# Altium PCB STM32F101.PcbDoc
Units mm, origin at the board's own origin, x right, y up, seen from the top; angles counter-clockwise.
Board outline 45 x 45 mm, 2 copper layers (Top Layer, Bottom Layer); 38 components, 25 nets, 183 pads, 61 vias.
Unrouted connection lines stored in the file: 3.
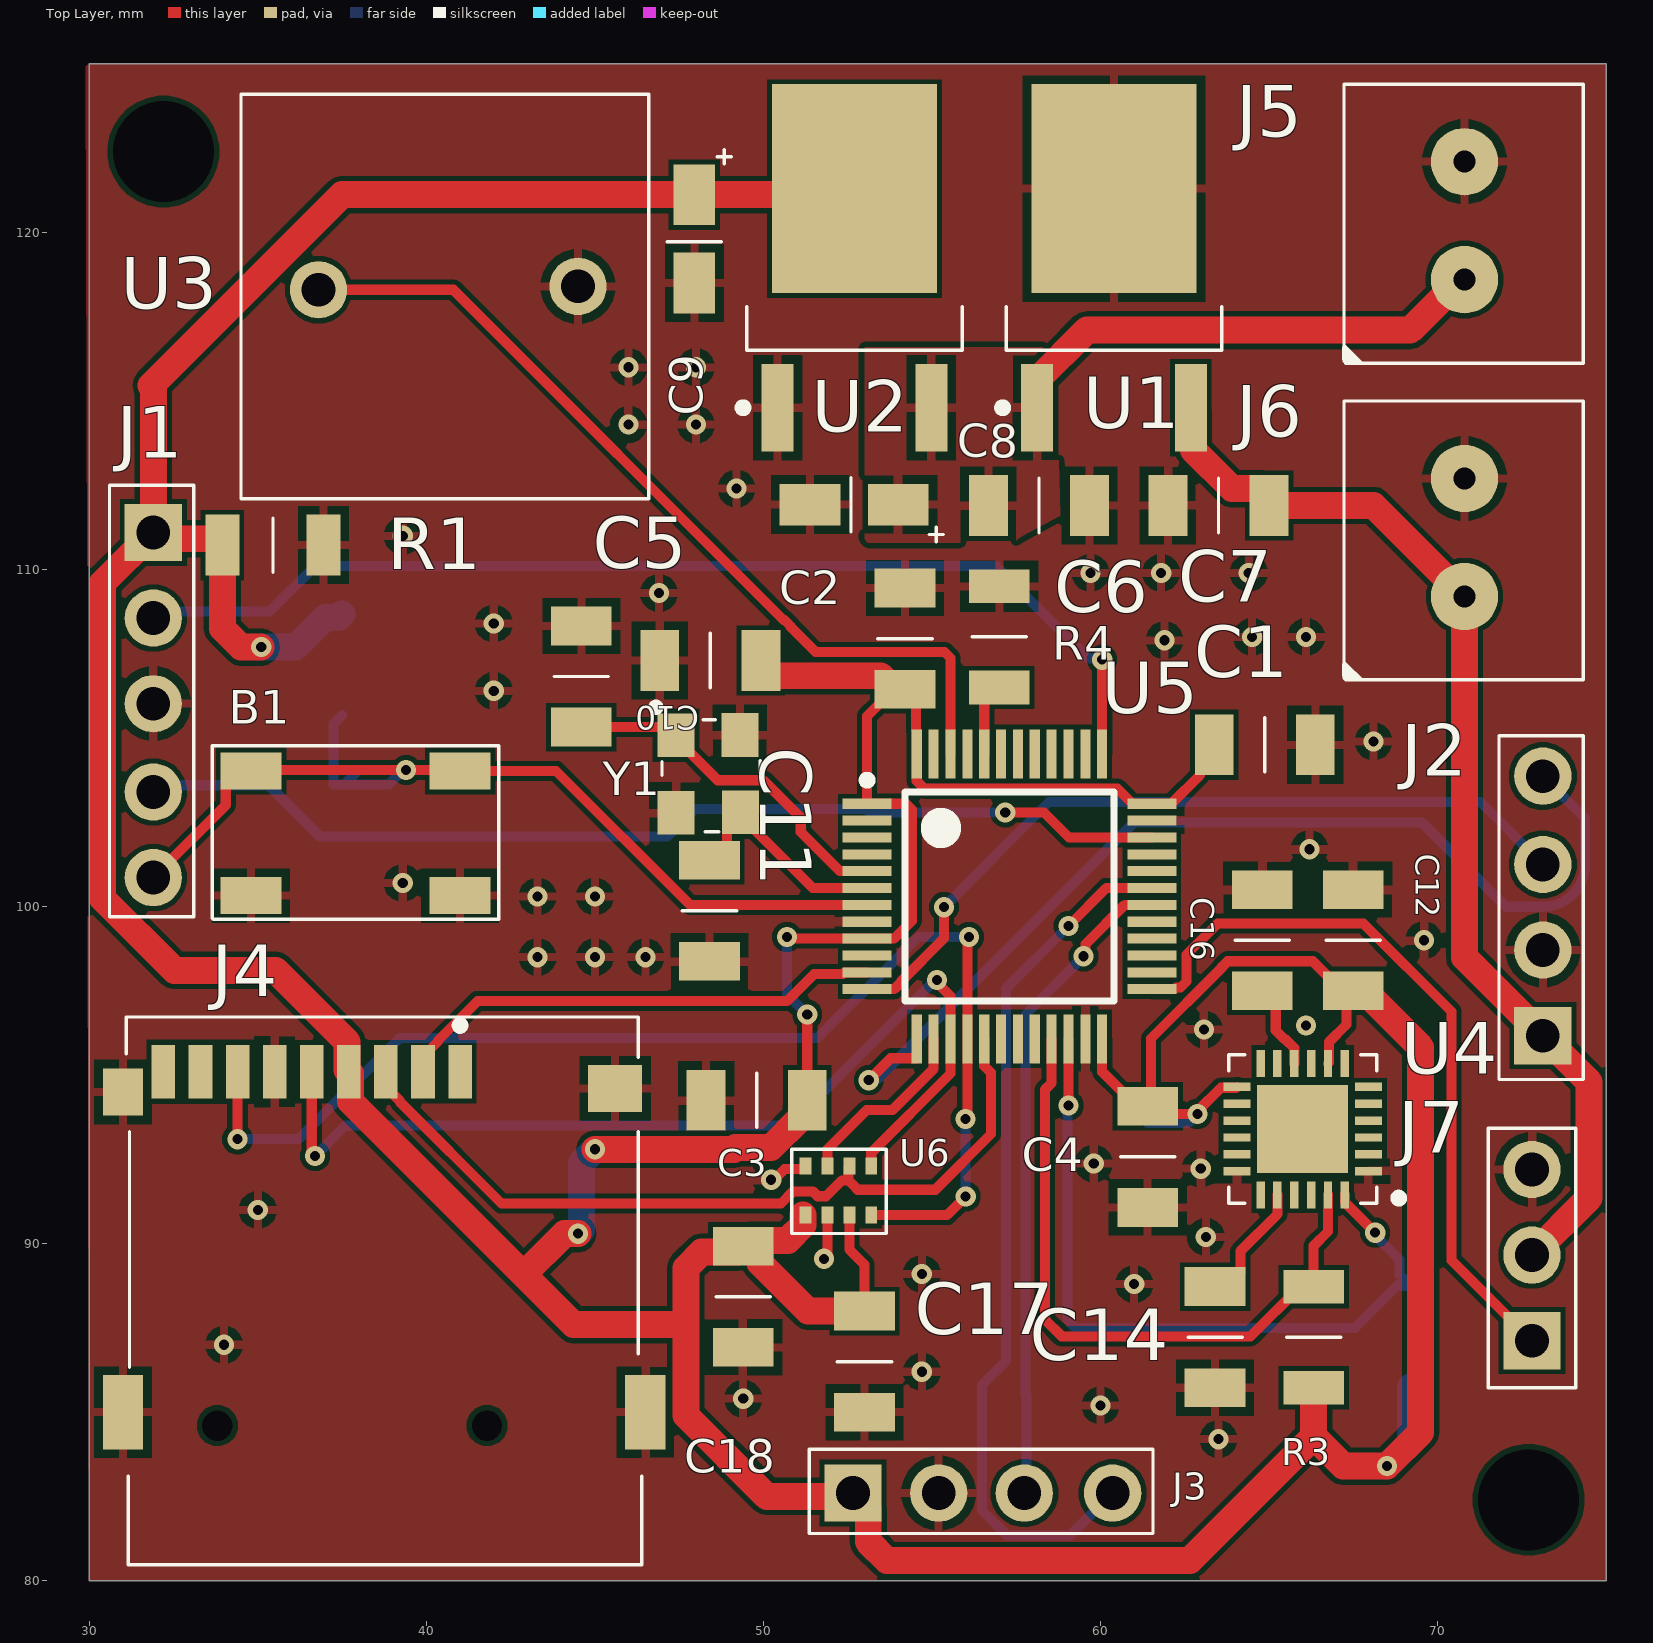
[diagram p0: Top Layer view]
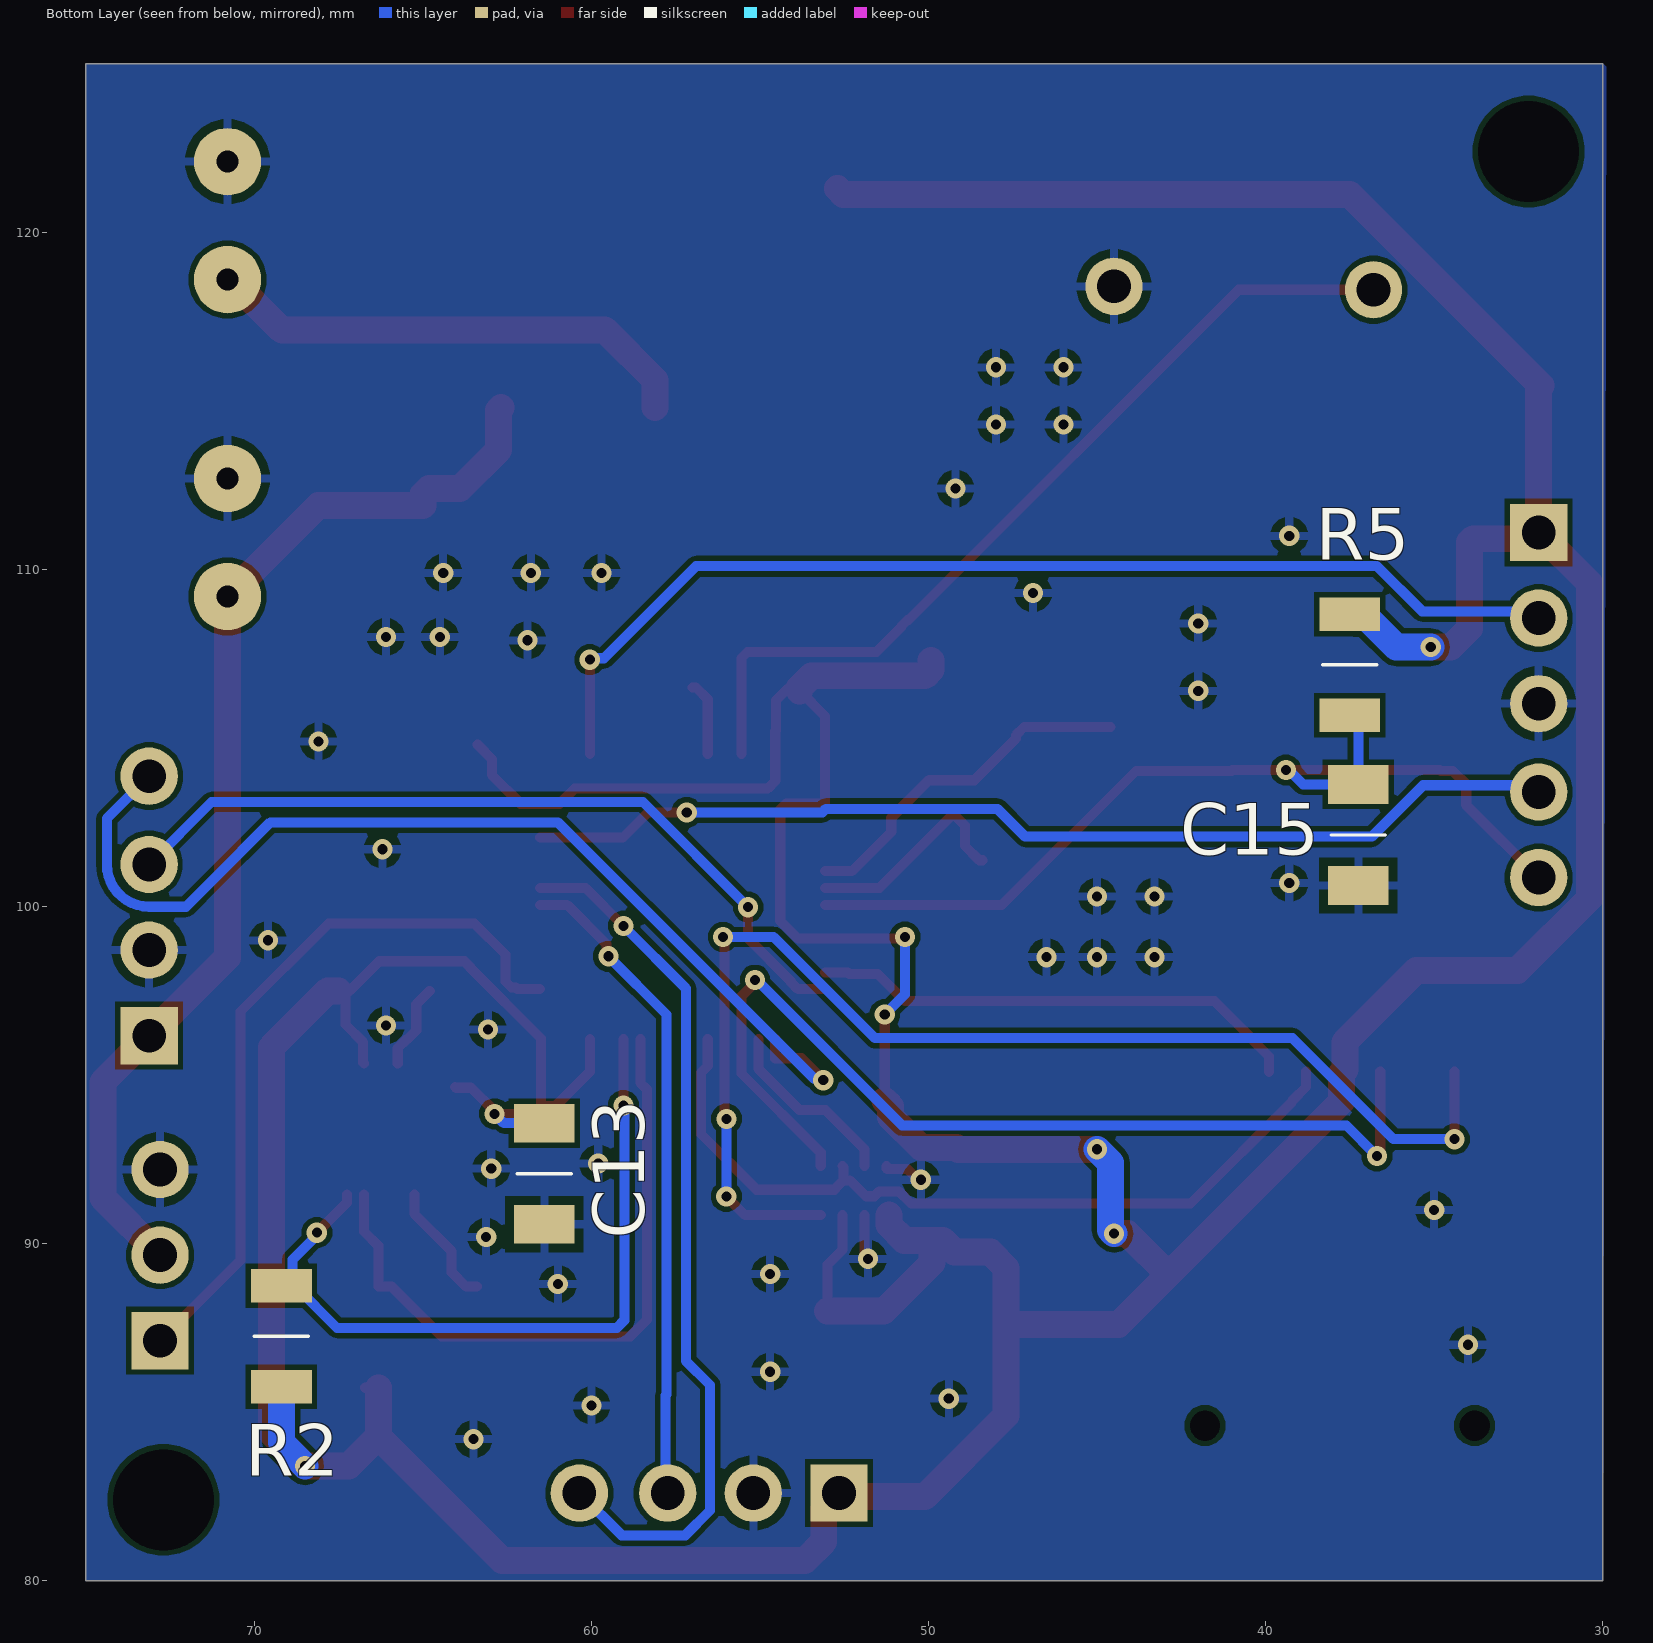
[diagram p1: Bottom Layer view, seen from below]
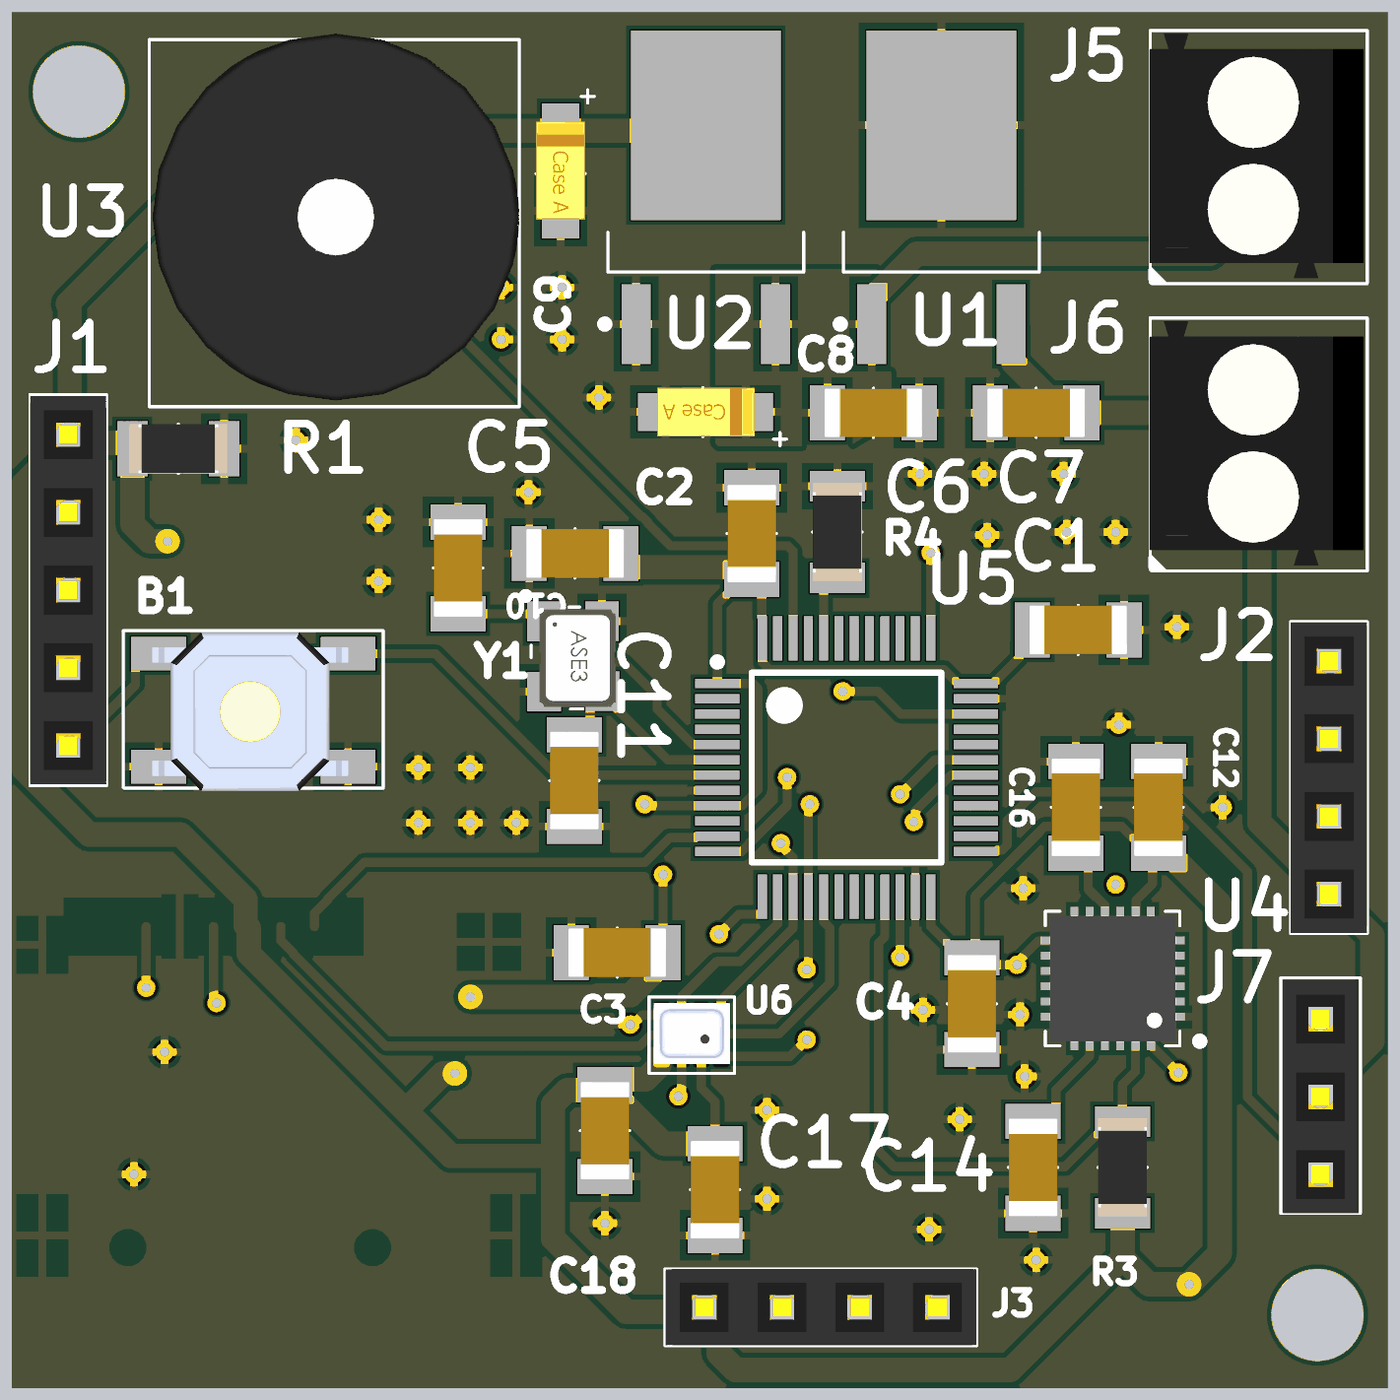
[diagram p2: 3D render of the assembled board from above, using the file's embedded part models]
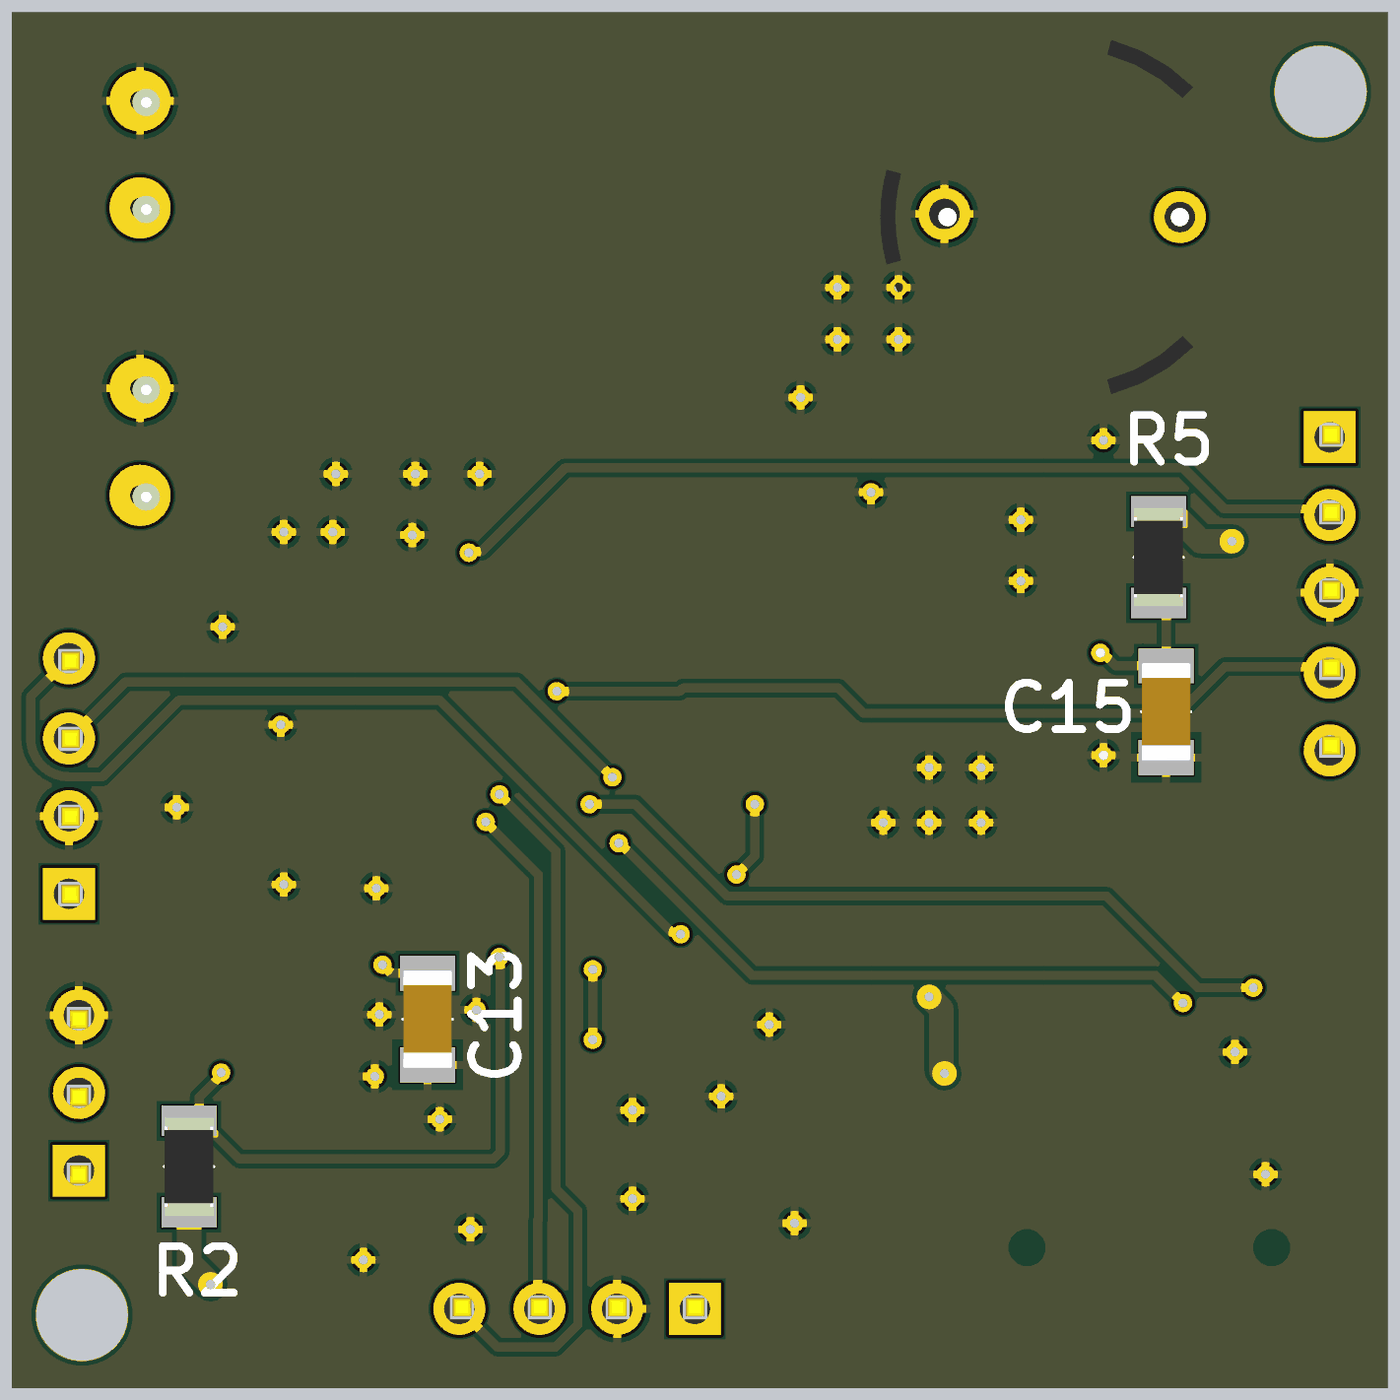
[diagram p3: 3D render of the assembled board from below, using the file's embedded part models]

## Layer stack, top to bottom
Top Solder: solder mask 0.0102, Solder Resist, Dk 3.5
Top Layer: signal copper 0.0356
Dielectric 1: dielectric 0.32, FR-4, Dk 4.8
Bottom Layer: signal copper 0.0356
Bottom Solder: solder mask 0.0102, Solder Resist, Dk 3.5

## Board outline
30,80 30,125 75,125 75,80

## Design rules (kind name [scope] priority, off if disabled: settings)
Clearance [All] p1: gap=0.254 ignorepadtopadclearanceinfootprint=FALSE except(0: Arc-Hole Track-Hole SMDPad-Hole THPad-Hole Via-Hole Fill-Hole Poly-Hole Region-Hole Text-Hole; 0.152: Arc-Track Arc-SMDPad Arc-Poly Track-Track Track-SMDPad Track-Poly SMDPad-SMDPad SMDPad-THPad SMDPad-Poly THPad-Poly Via-Poly Fill-Poly Poly-Poly)
PolygonConnect [All] p1: connectstyle=Relief reliefconductorwidth=0.254 reliefentries=4 polygonreliefangle="90 Angle" airgapwidth=0.254
RoutingVias [All] p1: holewidth=0.3 width=0.6 viastyle="Through Hole" minholewidth=0.2 minwidth=0.2 maxholewidth=0.9 maxwidth=1.27
SolderMaskExpansion [All] p1: expansion=0.102 istentingtop=FALSE
Width [All] p1: maxlimit=1 minlimit=0.254 preferedwidth=0.3 minimp=50.000000 maximp=50.000000 favimp=50.000000
30 further rules are at their usual default settings.

## Components (designator, comment, footprint, x,y, rotation, side; value= is the part's Value field where it differs from the comment)
B1 "PUSH BUTTON" "PUSH BUTTON" 37.7,102.025 r0 top
C1 "0.1 uF C1206" C1206 64.8,104.8 r0 top
C2 "0.1 uF C1206" C1206 54.2,107.875 r90 top
C3 "0.1 uF C1206" C1206 49.875,94.25 r180 top
C4 "0.1 uF C1206" C1206 61.4,92.65 r270 top
C5 "0.1 uF C1206" C1206 48.5,107.3 r180 top
C6 "330nf C1206" C1206 58.1,111.9 r0 top
C7 "0.1 uF C1206" C1206 63.575,111.9 r180 top
C8 "10uF TANTAL" "C1206 TANTAL" 52.8,111.925 r180 top
C9 "10uF TANTAL" "C1206 TANTAL" 47.95,119.92 r270 top
C10 "16 pF" C1206 44.6,106.9 r270 top
C11 "16 pF" C1206 48.4,99.8 r90 top
C12 "0.1 uF C1206" C1206 67.5,98.925 r90 top
C13 "0.1 uF C1206" C1206 61.4,92.15 r270 bottom
C14 "2.2 nF" C1206 63.4,87.3 r270 top
C15 "0.1 uF C1206" C1206 37.25,102.2 r270 bottom
C16 "0.1 uF C1206" C1206 64.8,98.925 r90 top
C17 "0.1 uF C1206" C1206 53,86.575 r270 top
C18 "0.1 uF C1206" C1206 49.4,88.5 r270 top
J1 "HEADER 2.54 1x5" "HEADER 2.54 1x5" 31.9,111.1 r270 top
J2 "HEADER 2.54 1x4" "HEADER 2.54 1x4" 73.125,96.17 r90 top
J3 "HEADER 2.54 1x4" "HEADER 2.54 1x4" 52.66,82.6 r0 top
J4 "MICRO SD CARD HOLDER" "MICRO SD CARD HOLDER" -5.984,75.025 r0 top
J5 "KLEMENS 3.5mm" "KLEMENS 3.5mm" 78.55,98.5 r90 top
J6 "KLEMENS 3.5mm" "KLEMENS 3.5mm" 78.55,89.1 r90 top
J7 "HEADER 2.54 1x3" "HEADER 2.54 1x3" 72.8,87.12 r90 top
R1 "10K R1206" "1206 RESISTOR" 35.375,110.825 r0 top
R2 "4.7K R1206" "1206 RESISTOR" 69.3,87.175 r90 bottom
R3 "4.7K R1206" "1206 RESISTOR" 66.225,87.15 r90 top
R4 "10K R1206" "1206 RESISTOR" 56.9,107.925 r90 top
R5 "10K R1206" "1206 RESISTOR" 37.4,107.25 r270 bottom
U1 "L7805-DPAK" DPAK228P972X230-3N 60.4,118.95 r90 top
U2 "LD108633 DPAK" DPAK228P972X230-3N 52.7,118.95 r90 top
U3 "BUZZER 5V" "BUZZER 5V" 37,118.2 r90 top
U4 "MPU6050" QFN50P400X400X90_HS-25N 66,93.4 r180 top
U5 "STM32F101" LFQP48-STM32 57.3,100.3 r0 top
U6 "BMP280" BMP280 51.24,92.299 r90 top
Y1 "8Mhz 12.5 pF Osc" "8 Mhz Osc" 48.5,104 r270 top

## Footprints (in the part's own frame and the unit in brackets; to place one, negate y for a bottom-side part, rotate by r counter-clockwise, add the part's x,y. Pads: shape width x height; smd on the part's side, far side on the other; paste and mask are expansions set on the pad)
"8 Mhz Osc" [mm]
  rect 1.3x1.1 smd mask+0.05: 1(-1.081,-1.09) 2(1.219,-1.09) 3(1.203,0.817) 4(-1.086,0.801)
  silkscreen extent -2.01,-1.79 1.78,1.41, body extent -1.48,-1.24 1.72,1.26, height 1.22
"1206 RESISTOR" [mm]
  rect 1x1.8 smd mask+0.05: 1(-1.425,-0.1) 2(1.575,-0.1)
  silkscreen extent 0.08,-0.9 0.08,0.71, body extent -1.52,-0.9 1.68,0.71, height 0.55
BMP280 [mm]
  rect 0.5x0.35 smd: 1(0.001,-0.01) 2(0.001,-0.66) 3(0.001,-1.31) 4(0.001,-1.96) 5(-1.449,-1.96) 6(-1.449,-1.31) 7(-1.449,-0.66) 8(-1.449,-0.01)
  silkscreen extent -2,-2.4 0.5,0.4, body extent -1.7,-2.25 0.3,0.25, height 0.95
"BUZZER 5V" [mm]
  round 1.7 hole 1: 1(0.1,0.2) 2(0.2,-7.5)
  silkscreen extent -6.1,-9.6 5.9,2.5, body extent -5.9,-9.6 6.1,2.4, height 9
C1206 [mm]
  rect 1.15x1.8 smd mask+0.05: 1(-1.425,0) 2(1.575,0)
  silkscreen extent 0.08,-0.8 0.08,0.81, body extent -1.52,-0.8 1.68,0.8, height 1
"C1206 TANTAL" [mm]
  rect 1.8x1.23 smd mask+0.05: 1(-1.2,0) 1(-1.2,0) 2(1.42,0)
  silkscreen extent -2.54,-0.8 0.2,1.1, body extent -1.5,-0.8 1.7,0.8, height 1.62
DPAK228P972X230-3N [mm] "D-PAK, 3-Pads, Body 6,40x6,56mm (max), IPC Medium Density"
  rect 2.6x0.95 smd mask+0.05: 1(-4.15,2.28) 2(-4.15,-2.28)
  rect 6.2x4.9 smd mask+0.05: 3(2.35,0)
  silkscreen extent -4.27,-3.2 -1.15,3.43, body extent -2.5,-3.2 4.1,3.2, height 2.3
"HEADER 2.54 1x3" [mm]
  rect 1.7x1.7 hole 1: 1(0,0)
  round 1.7 hole 1: 2(2.54,0) 3(5.08,0)
  silkscreen extent -1.4,-1.3 6.3,1.3, body extent -1.4,-1.25 6.22,1.25, height 9.1
"HEADER 2.54 1x4" [mm]
  rect 1.7x1.7 hole 1: 1(0,0)
  round 1.7 hole 1: 2(2.54,0) 3(5.08,0) 4(7.7,0)
  silkscreen extent -1.3,-1.2 8.9,1.3, body extent -1.28,-1.2 8.88,1.3, height 9.1
"HEADER 2.54 1x5" [mm]
  rect 1.7x1.7 hole 1: 1(0,0)
  round 1.7 hole 1: 2(2.54,0) 3(5.08,0) 4(7.7,0) 5(10.24,0)
  silkscreen extent -1.4,-1.3 11.4,1.2, body extent -1.35,-1.3 11.35,1.2, height 9.1
"KLEMENS 3.5mm" [mm]
  round 2 hole 0.65: 1(20.1,7.75) 2(23.6,7.75)
  silkscreen extent 17.59,4.22 25.9,11.38, body extent 17.8,4.35 25.79,11.35, height 8.9
LFQP48-STM32 [mm]
  rect 1.45x0.3 smd mask+0.05: 1(-4.225,2.75) 2(-4.225,2.25) 3(-4.225,1.75) 4(-4.225,1.25) 5(-4.225,0.75) 6(-4.225,0.25) 7(-4.225,-0.25) 8(-4.225,-0.75) 9(-4.225,-1.25) 10(-4.225,-1.75) 11(-4.225,-2.25) 12(-4.225,-2.75) 25(4.225,-2.75) 26(4.225,-2.25) 27(4.225,-1.75) 28(4.225,-1.25) 29(4.225,-0.75) 30(4.225,-0.25) 31(4.225,0.25) 32(4.225,0.75) 33(4.225,1.25) 34(4.225,1.75) 35(4.225,2.25) 36(4.225,2.75)
  rect 0.3x1.45 smd mask+0.05: 13(-2.75,-4.225) 14(-2.25,-4.225) 15(-1.75,-4.225) 16(-1.25,-4.225) 17(-0.75,-4.225) 18(-0.25,-4.225) 19(0.25,-4.225) 20(0.75,-4.225) 21(1.25,-4.225) 22(1.75,-4.225) 23(2.25,-4.225) 24(2.75,-4.225) 37(2.75,4.225) 38(2.25,4.225) 39(1.75,4.225) 40(1.25,4.225) 41(0.75,4.225) 42(0.25,4.225) 43(-0.25,4.225) 44(-0.75,4.225) 45(-1.25,4.225) 46(-1.75,4.225) 47(-2.25,4.225) 48(-2.75,4.225)
  silkscreen extent -4.35,-3.1 3.1,3.57, body extent -3.5,-3.5 3.5,3.5, height 1.6
"MICRO SD CARD HOLDER" [mm]
  rect 0.7x1.6 smd paste+0 mask+0: 1(46.984,20.075) 2(45.884,20.075) 3(44.784,20.075) 4(43.684,20.075) 5(42.584,20.075) 6(41.484,20.075) 7(40.384,20.075) 8(39.284,20.075) Cd(38.184,20.075)
  rect 1.2x1.4 smd paste+0 mask+0: 10(36.984,19.475)
  rect 1.6x1.4 smd paste+0 mask+0: 11(51.584,19.575)
  rect 1.2x2.2 smd paste+0 mask+0: 12(36.984,9.975) 13(52.484,9.975)
  round 0 hole 0.9 unplated paste-1000 mask+0: ""(39.784,9.575) ""(47.784,9.575)
  silkscreen extent 37.08,5.45 52.38,21.7, body extent 36.73,5.58 52.73,20.83, height 1.85
"PUSH BUTTON" [mm]
  rect 1.8x1.1 smd mask+0.05: 1(-2.9,2) 2(3.3,2) 3(-2.9,-1.7) 4(3.3,-1.7)
  silkscreen extent -4.05,-2.4 4.45,2.75, body extent -3.1,-2.5 3.3,2.7, height 1.5
QFN50P400X400X90_HS-25N [mm] "QFN, 24-Leads, Body 4,00x4,00mm, Pitch 0,50mm, Thermal Pad 2,70x2,60mm, IPC Medium Density"
  rect 0.8x0.25 smd mask+0.01: 1(-1.95,1.25) 2(-1.95,0.75) 3(-1.95,0.25) 4(-1.95,-0.25) 5(-1.95,-0.75) 6(-1.95,-1.25) 13(1.95,-1.25) 14(1.95,-0.75) 15(1.95,-0.25) 16(1.95,0.25) 17(1.95,0.75) 18(1.95,1.25)
  rect 0.25x0.8 smd mask+0.01: 7(-1.25,-1.95) 8(-0.75,-1.95) 9(-0.25,-1.95) 10(0.25,-1.95) 11(0.75,-1.95) 12(1.25,-1.95) 19(1.25,1.95) 20(0.75,1.95) 21(0.25,1.95) 22(-0.25,1.95) 23(-0.75,1.95) 24(-1.25,1.95)
  rect 2.7x2.6 smd mask+0.05: 25(0,0)
  silkscreen extent -2.98,-2.2 2.2,2.2, body extent -2.07,-2.07 2.07,2.07, height 0.9

## Part data
C1 C2 C3 C4 C5 C7 C12 C13 C15 C16 C17 C18: "0.1 uF"
C6: "330 nF"
U1: "L7805 5V REGULATOR"
U2: "LD108633 3.3V REGULATOR"
U4: "MPU6050 GYRO"
U5: "STM32F101 48 pinli Mikroişlemci"
U6: "Pressure Sensor"

## Free pads (board coordinates)
  round 0 hole 3: 14(32.2,122.4) 14(32.2,122.4) 14(72.7,82.4)

## Via types
v1: diameter 0.6, hole 0.3, Top Layer to Bottom Layer, 61 vias

## Nets (pads, with @x,y where several pads share a name; then routed paths per layer and width w, separated by ;. In a path a pad name is that pad's centre, name@x,y a point inside that pad or via, vN(x,y) a via of type N, cw(c..) or ccw(c..) an arc to the next point about the centre after c; other vN are vias at no path point)
3.3V: C1.1 C2.1 C3.1 C4.1 C5.1 C9.1 C12.1 C13.1 C17.1 C18.1 J1.1 J3.1 J4.4 R1.1 R2.1 R3.1 R5.1 U2.3 U4.8 U4.13 U5.1 U5.9 U5.24 U5.36 U5.48 U6.6 U6.8 | length 198.9
  Top Layer w0.3: v1(50.7,99.1) 50.75,99.05 U5.9 53.877,99.05 54.4,99.573 54.4,102.874 54.224,103.05 U5.1 53.075,105.65 53.825,106.4 53.875,106.45 C2.1 54.525,106.125 54.525,105.213 54.55,105.188 U5.48 54.55,103.723 54.775,103.498 60.502,103.498 60.95,103.05 U5.36 62.1,103.05 62.95,103.9 62.95,104.375 C1.1 ; C3.1 v1(51.3,96.8) ; U6.6 52.55,89.825 53,89.375 C17.1 ; U5.24 60.05,95.1 61.075,94.075 C4.1 ; U4.13 64.025,94.625 63.573,94.625 62.875,93.927 v1(62.875,93.85) 61.625,93.85 C4.1 ; R3.1 R3.1@66.725,85.725 ; U4.8 66.775,95.375 66.775,95.975 67.3,96.5 67.3,97.3 C12.1 67.175,97.5 66.298,98.377 63.775,98.377 63.598,98.2 63.598,98.182 61.5,96.084 61.5,94.175 C4.1
  Top Layer w0.8: v1(35.1,107.7) 34.5,107.7 33.95,108.25 33.95,110.812 33.85,110.912 32.087,110.912 J1.1 ; v1(44.496,90.296) 44.096,90.296 42.885,89.085 ; v1(45,92.8) v1(45,92.8) 49.125,92.798 49.176,92.849 50.224,92.849 51.125,93.75 51.125,94.075 C3.1 ; C18.1@49.9,89.75 49.9,89.425 51.325,88 C17.1 ; C5.1 49.925,107.023 50.1,106.848 53.477,106.848 53.825,106.5 C2.1@53.825,106.4 ; U6.8@51.173,90.85 51.173,90.55 50.723,90.1 49.575,90.1 C18.1 49.225,89.75 48.169,89.75 47.7,89.281 47.7,87.6 ; U2.3 52.52,121.12 47.95,121.12 37.493,121.12 31.837,115.463 31.9,115.4 J1.1 ; R3.1 66.325,84.275 ; C12.1 67.825,97.5 69.5,95.825 69.5,84.4 v1(68.5,83.4) 67.2,83.4 66.325,84.275 ; J1.1 30.396,109.596 30.396,100.237 32.524,98.109 35.522,98.109 37.65,95.981 37.65,95.15 J4.4 37.75,95.05 37.75,94.219 42.885,89.085 ; 42.885,89.085 44.369,87.6 47.7,87.6 ; 47.7,87.6 47.7,84.9 50.1,82.5 52.56,82.5 J3.1 53.11,82.15 53.11,81.159 53.669,80.6 62.65,80.6 66.325,84.275
  Bottom Layer w0.3: v1(50.7,99.1) 50.7,97.4 v1(51.3,96.8) ; C13.1 62.6,93.575 v1(62.875,93.85)
  Bottom Layer w0.8: v1(35.1,107.7) 36.125,107.7 37,108.575 37.4,108.575 R5.1 ; v1(44.496,90.296) 44.6,90.4 44.6,92.4 v1(45,92.8) ; v1(68.5,83.4) 69.2,84.1 R2.1
5V: C7.1 J2.1 J6.1 J7.2 U1.2 | length 33.1
  Top Layer w0.8: U1.2 62.755,114.725 62.755,113.545 63.9,112.4 64.825,112.4 65,112.225 C7.1 68.1,111.9 J6.1 70.8,98.495 J2.1 74.5,94.795 74.5,91.36 J7.2
7.4V: C6.1 C8.1 J5.1 U1.1 U2.2 | length 14.7
  Top Layer w0.8: U1.1 58.12,115.625 59.595,117.1 69.189,117.1 70.689,118.6 J5.1
GND: B1.3 B1.4 C1.2 C2.2 C3.2 C4.2 C5.2 C6.2 C7.2 C8.2 C9.2 C10.1 C11.1 C12.2 C13.2 C14.2 C15.2 C16.2 C17.2 C18.2 J1.3 J2.2 J3.2 J4.6 J4.10 J4.11 J4.12 J4.13 J5.2 J6.2 J7.3 R1.2 R4.2 U1.3 U2.1 U3.2 U4.1 U4.9 U4.11 U4.18 U5.8 U5.23 U5.35 U5.47 U6.1 U6.7 Y1.2 Y1.4 | length 2.6
  Top Layer w0.3: v1(50.23,91.895) 50.311,91.895 50.625,92.209 51.225,92.209 51.25,92.234 U6.1 ; v1(51.8,89.55) 51.8,89.631 51.9,89.731 U6.7
  other v1: 63.5,84.2 60,85.2 49.4,85.4 54.7,86.2 34,87 61,88.8 54.7,89.1 63.125,90.2 35,91 62.975,92.225 59.8,92.375 63.075,96.35 66.1,96.475 43.3,98.5 45,98.5 46.5,98.5 69.6,99 43.3,100.3 45,100.3 39.3,100.7 66.2,101.7 68.1,104.9 42,106.4 61.9,107.9 64.5,108 66.1,108 42,108.4 46.9,109.3 59.7,109.9 61.8,109.9 64.4,109.9 39.3,111 49.2,112.4 46,114.3 48,114.3 46,116 48,116
NetC10_2: C10.2 U5.5 Y1.1 | length 10.5
  Top Layer w0.3: C10.2 47.167,105.325 Y1.1 47.41,104.981 48.643,103.749 49.992,103.749 51.109,102.633 51.109,102.214 52.273,101.05 U5.5
NetC11_2: C11.2 U5.6 Y1.3 | length 6.6
  Top Layer w0.3: C11.2 48.492,101.375 48.917,101.8 48.917,102.397 Y1.3 49.317,102.697 51.464,100.55 U5.6
NetC14_1: C14.1 U4.20 | length 3.7
  Top Layer w0.3: C14.1 63.725,88.725 64.15,89.15 64.15,89.775 65.25,90.875 U4.20
NetC16_1: C16.1 U4.10 | length 2.6
  Top Layer w0.3: C16.1 65.2,97.1 65.2,96.325 65.473,96.052 65.5,96.052 65.75,95.802 U4.10
NetJ1_2: J1.2 U5.37 | length 32.7
  Top Layer w0.3: U5.37 v1(60.05,107.325)
  Bottom Layer w0.3: J1.2 32.1,108.76 35.357,108.76 36.697,110.1 56.9,110.1 59.632,107.368 60.007,107.368 v1(60.05,107.325)
NetJ1_4: J1.4 U5.34 | length 31
  Top Layer w0.3: v1(57.173,102.794) 58.325,102.794 59.069,102.05 U5.34
  Bottom Layer w0.3: J1.4 32.1,103.6 35.325,103.6 36.85,102.075 47.134,102.075 47.959,102.9 53.049,102.9 53.155,102.794 v1(57.173,102.794)
NetJ2_3: J2.3 U5.12 | length 23.7
  Top Layer w0.3: U5.12 53.877,97.55 54.102,97.775 54.102,97.802 55.357,99.057 v1(55.357,99.982)
  Bottom Layer w0.3: v1(55.357,99.982) 58.475,103.1 71.275,103.1 J2.3
NetJ2_4: J2.4 U5.13 | length 31.6
  Top Layer w0.3: v1(53.125,94.85) 53.775,95.5 54.55,95.5 U5.13
  Bottom Layer w0.3: v1(53.125,94.85) 53.182,94.907 53.407,94.907 61,102.5 69.528,102.5 71.258,100.769 72.032,99.996 73.125,99.996 ccw(c73.125,101.25) 74.379,101.25 74.379,102.616 J2.4
NetJ3_3: J3.3 U5.30 | length 19.5
  Top Layer w0.3: v1(59.5,98.525) 59.557,98.582 59.557,98.884 60.723,100.05 U5.30
  Bottom Layer w0.3: J3.3 57.8,82.66 57.8,85.5 57.775,85.525 57.775,96.8 v1(59.5,98.525)
NetJ3_4: J3.4 U5.31 | length 26
  Top Layer w0.3: v1(59.05,99.425) 60.175,100.55 U5.31
  Bottom Layer w0.3: v1(59.05,99.425) 57.2,97.575 57.2,86.52 56.486,85.806 56.486,82.081 57.221,81.346 59.106,81.346 J3.4
NetJ4_2: J4.2 U5.11 | length 14.7
  Top Layer w0.3: J4.2 39.9,95.55 40.348,95.998 40.348,96.025 41.523,97.2 50.704,97.2 51.506,98.002 52.364,98.002 52.412,98.05 U5.11
NetJ4_3: J4.3 U5.17 U6.3 | length 24.4
  Top Layer w0.3: J4.3 38.8,94.65 39.213,94.237 39.213,94.21 42.232,91.191 50.521,91.191 50.882,91.552 51.464,91.552 51.61,91.406 51.858,91.406 52.327,91.875 52.525,91.875 ; U6.3 52.525,92.275 52.525,91.875 ; U5.17 56.55,95.273 56.75,95.073 56.75,93.25 55.1,91.6 52.8,91.6 52.663,91.738 52.525,91.875
NetJ4_5: J4.5 U5.15 U6.4 | length 29.8
  Top Layer w0.3: J4.5 36.6,92.781 36.7,92.681 v1(36.7,92.6) ; U6.4 53.2,92.7 55.55,95.05 55.55,97.344 55.15,97.744 v1(55.15,97.825)
  Bottom Layer w0.3: v1(36.7,92.6) 37.604,93.504 50.783,93.504 55.104,97.825 v1(55.15,97.825)
NetJ4_7: J4.7 U5.16 U6.5 | length 37
  Top Layer w0.3: v1(34.4,93.1) J4.7 ; U6.5 55.45,90.85 v1(56,91.4) ; v1(55.996,93.7) 56.05,93.754 U5.16 56.05,99.05 v1(56.1,99.1)
  Bottom Layer w0.3: v1(34.4,93.1) 36.204,93.1 39.2,96.096 51.592,96.096 54.596,99.1 v1(56.1,99.1) ; v1(55.996,93.7) 55.998,93.698 55.998,91.402 v1(56,91.4)
NetJ7_1: J7.1 U5.25 | length 22
  Top Layer w0.3: U5.25 62.188,97.55 62.236,97.598 62.375,97.598 62.552,97.775 62.552,98.577 63.475,99.5 67.8,99.5 70.413,96.887 70.413,89.507 J7.1
NetR2_2: R2.2 U4.24 U5.22 | length 22.7
  Top Layer w0.3: U5.22 59.05,94.104 v1(59.054,94.1) ; U4.24 67.25,91.225 v1(68.15,90.325)
  Bottom Layer w0.3: v1(59.054,94.1) 59.025,94.071 59.025,87.726 59.251,87.5 67.55,87.5 68.8,88.75 R2.2 68.87,89.08 68.87,89.524 68.15,90.244 v1(68.15,90.325)
NetR3_2: R3.2 U4.23 U5.21 | length 20.1
  Top Layer w0.3: U5.21 58.55,94.769 58.35,94.569 58.35,87.75 58.85,87.25 64.45,87.25 65.925,88.725 R3.2 66.325,89.938 66.75,90.363 U4.23
NetR4_1: R4.1 U5.44 | length 2.2
  Top Layer w0.3: U5.44 56.55,106.15 56.9,106.5 R4.1
NetU3_1: U3.1 U5.46 | length 26.1
  Top Layer w0.3: U3.1 40.8,118.3 50.598,108.502 50.625,108.502 50.802,108.325 50.802,108.298 51.55,107.55 55.374,107.55 55.55,107.374 U5.46
NetU5_14: U5.14 U6.2 | length 5.5
  Top Layer w0.3: U6.2 51.9,92.8 53.06,93.96 53.821,93.96 55.05,95.189 U5.14
NRST: B1.1 B1.2 C15.1 J1.5 R5.2 U5.7 | length 29.7
  Top Layer w0.3: J1.5@31.4,101.06 J1.5@31.485,101.06 ; J1.5 34.05,103.01 34.05,103.625 34.45,104.025 B1.1 34.825,104.05 v1(39.4,104.05) 40.975,104.05 B1.2 43.848,104.025 47.823,100.05 U5.7
  Bottom Layer w0.3: R5.2 37.25,105.425 C15.1 C15.1@37.575,103.625 ; C15.1@38,104.05 C15.1@37.575,103.625 ; v1(39.4,104.05) 39.319,104.05 38.894,103.625 C15.1@37.575,103.625
pads on no net: J4. J4.1 J4.8 J4.Cd U4.2 U4.3 U4.4 U4.5 U4.6 U4.7 U4.12 U4.14 U4.15 U4.16 U4.17 U4.19 U4.21 U4.22 U4.25 U5.2 U5.3 U5.4 U5.10 U5.18 U5.19 U5.20 U5.26 U5.27 U5.28 U5.29 U5.32 U5.33 U5.38 U5.39 U5.40 U5.41 U5.42 U5.43 U5.45

## Polygon pours and split planes (outlines as drawn)
GND on Top Layer "GND_L01_P009" (solid, pour order 9): 29.9,125 75,125 75,80 30,80
7.4V on Top Layer "7.4V_L01_P000" (solid, pour order 0): 53,116.6 58.5,116.6 58.7,116.3 58.8,111.6 57.7,111 57.4,110.8 53.1,110.8 53,110.9
GND on Bottom Layer "GND_L02_P010" (solid, pour order 10): 29.9,125 75,125 75,80 30,80

## Silkscreen, mask and mechanical layers (free items; w line width, h text height)
Mechanical 1:
  the board outline again, w0.1